# Altium PCB PCB_Diplomarbeit_V2_2025-03-31.pcbdoc
Units mil, origin at the board's own origin, x right, y up, seen from the top; angles counter-clockwise.
Board outline 4740 x 3290 mil, 2 copper layers (Top Layer, Bottom Layer); 76 components, 67 nets, 287 pads, 81 vias.
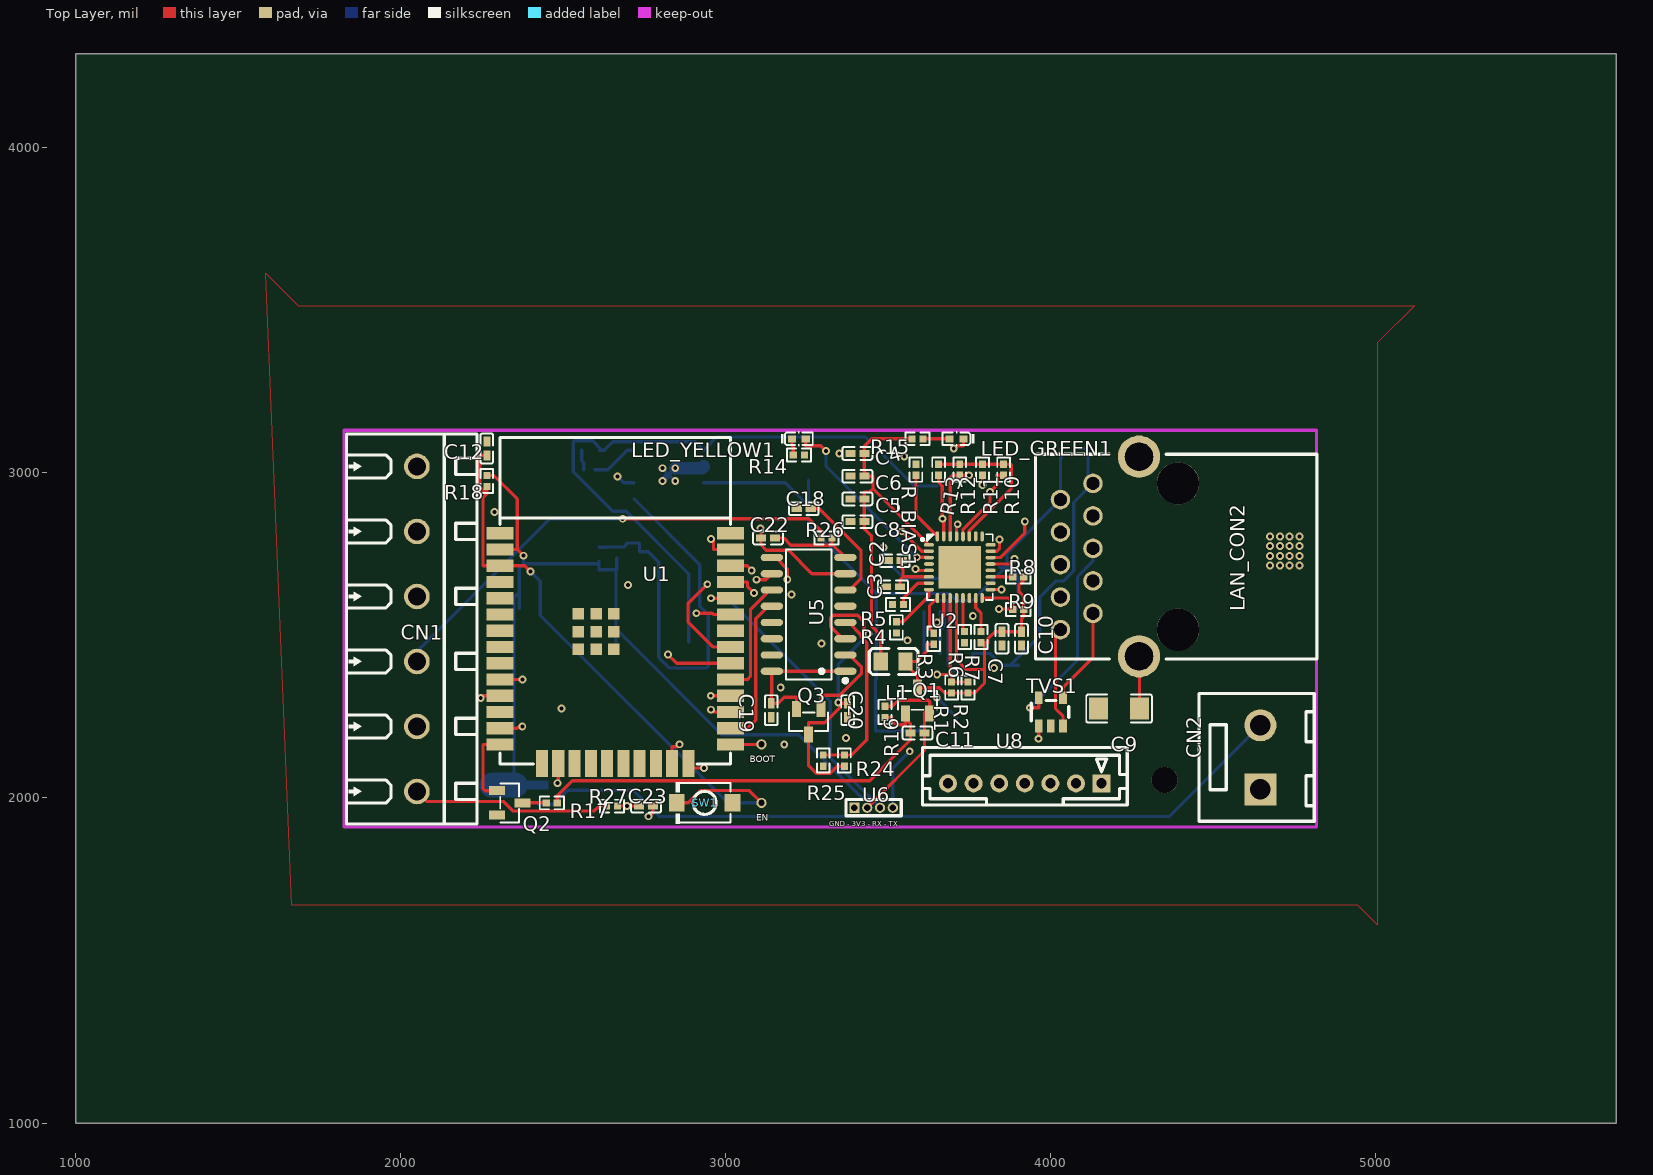
[diagram p0: Top Layer view]
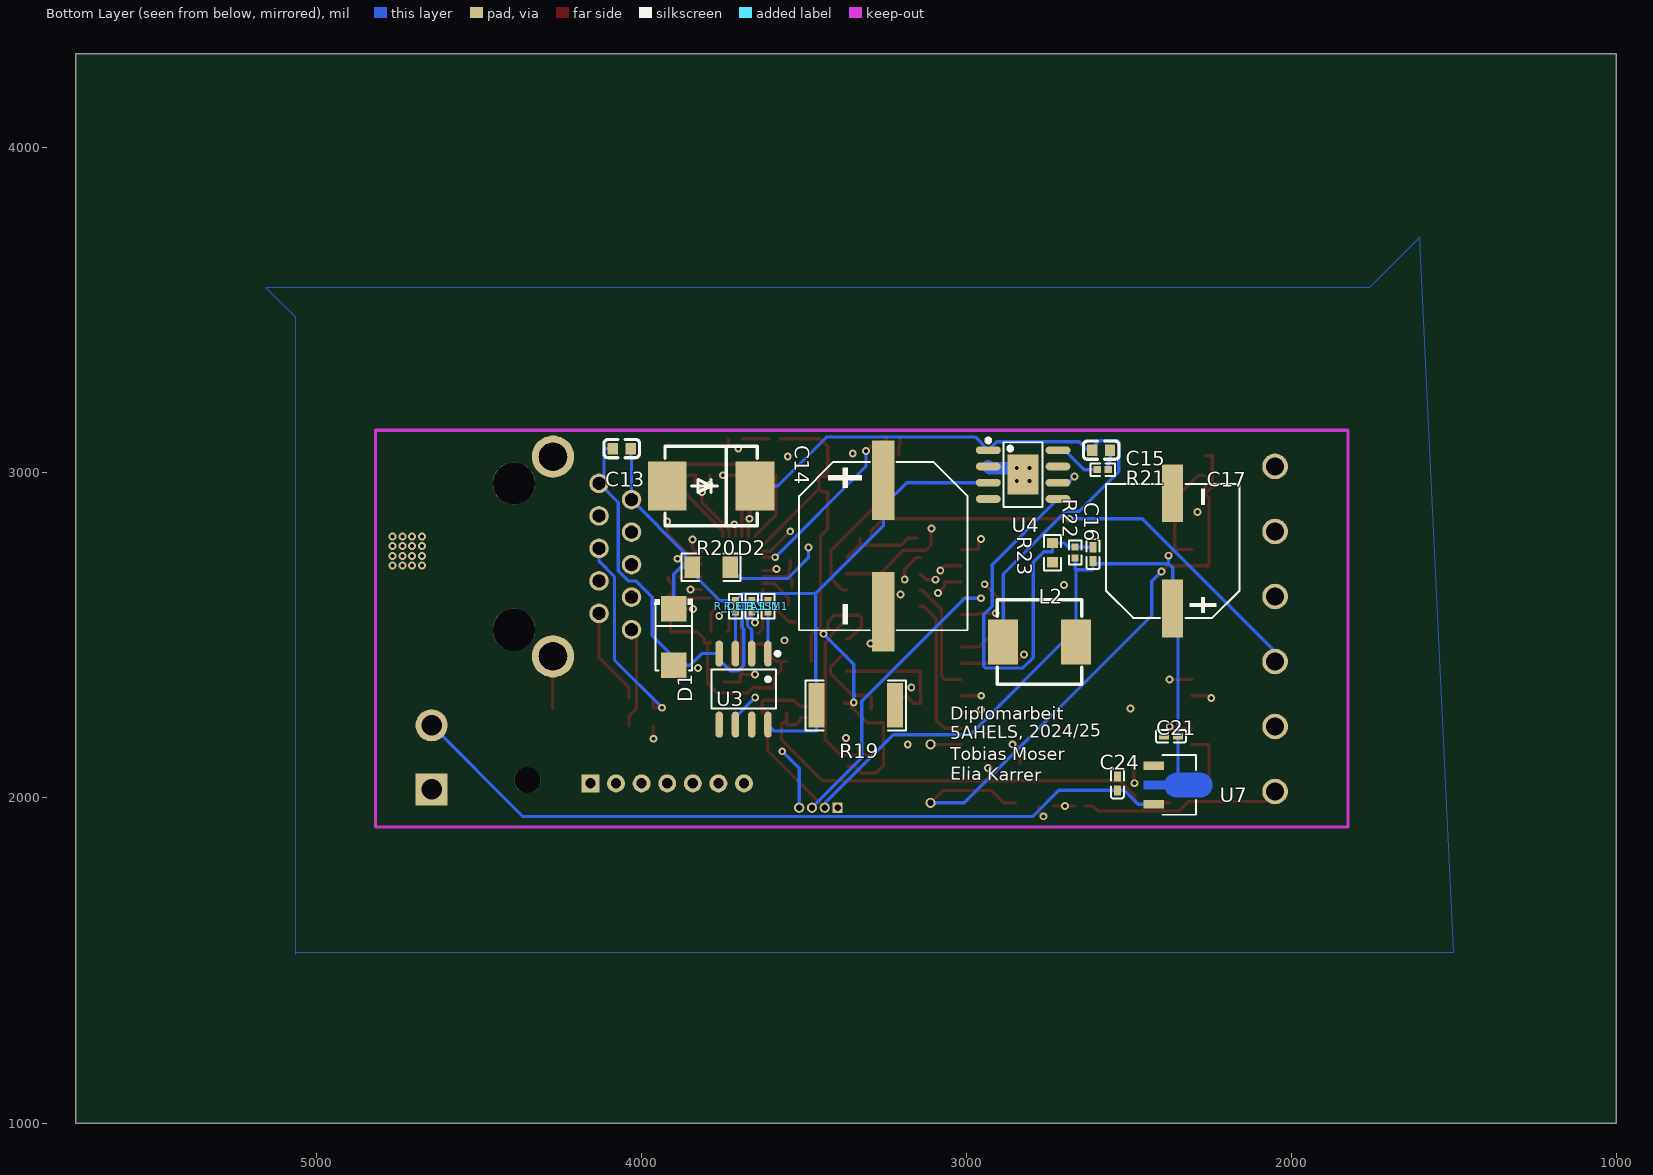
[diagram p1: Bottom Layer view, seen from below]

## Layer stack, top to bottom
Top Layer: signal copper (thickness not stored)
Dielectric: dielectric 12.6, FR-4, Dk 4.8
Bottom Layer: signal copper (thickness not stored)

## Board outline
5740,1000 1000,1000 1000,4290 5740,4290

## Components (designator, comment, footprint, x,y, rotation, side; value= is the part's Value field where it differs from the comment)
C2 "470pF" C0402#1 3520,2730 r0 top
C3 "1uF" C0402#1 3515,2650 r0 top
C4 "100nF" C0402#1 3405,3060 r0 top
C5 "100nF" C0402#1 3405,2920 r0 top
C6 "22uF" C0402#1 3405,2990 r0 top
C7 "100nF" C0402#1 3850,2490 r90 top
C8 "100nF" C0402#1 3405,2850 r0 top
C9 "1nF" C1206 4210,2275 r0 top
C10 "22uF" C0402#1 3910,2490 r90 top
C11 "22uF" C0402#1 3590,2200 r0 top
C12 "1uF" C0402#1 2265,3075 r270 top
C13 "100nF" C0603 4060,3075 r180 bottom
C14 "15uF" CAP-SMD_BD12.5-L13.0-W13.0-FD 3255,2775 r90 bottom
C15 "100nF" C0603 2585,3070 r180 bottom
C16 "12pF" C0402#2 2610,2750 r90 bottom
C17 "470uF" CAP-SMD_BD10.0-L10.3-W10.3-LS11.3-FD 2365,2760 r270 bottom
C18 "100nF" C0402#1 3240,2890 r180 top
C19 "10uF" C0402#1 3140,2270 r90 top
C20 "10uF" C0402#1 3375,2270 r270 top
C21 "100nF" C0402#2 2370,2190 r0 bottom
C22 "100nF" C0402#1 3130,2800 r0 top
C23 "100nF" C0402#1 2755,1975 r0 top
C24 "100nF" C0402#2 2535,2045 r90 bottom
CN1 "MX128-5.08-GN01-06P-CU-Y-A" CONN-TH_6P-MX128-5.08-GN01-06P-CU-Y-A 2050,2520 r270 top
CN2 "978-T-DS/02" CONN-TH_2P-P5.00_978-T-DS-02 4645,2125 r90 top
D1 "SMAJ58A" SMA_L4.3-W2.6-LS5.2-RD 3900,2495 r90 bottom
D2 "SS510" SMC_L7.1-W6.2-LS8.1-R-RD 3785,2960 r180 bottom
L1 "600Ω" L0805 3515,2420 r180 top
L2 "33uH" IND-SMD_L7.2-W6.6_GPSR0730 2775,2480 r0 bottom
LAN_CON2 "RJP-003TC1(LPJ4112CNL)" RJP-003TC1(LPJ4112CNL) 4360,2745 r90 top
LED_GREEN1 "SML-P11MTT86RH" LED0402-RD_GREEN 3710,3105 r180 top
LED_YELLOW1 "TJ-S1005CL4T5ALC9Y-A5" LED0402-RD_YELLOW 3225,3105 r0 top
Q1 "WPM2015-3/TR_C7472861" SOT-23-3_L2.9-W1.3-P1.90-LS2.4-BR 3590,2300 r270 top
Q2 "LMUN2211LT1G" SOT-23-3_L2.9-W1.3-P1.90-LS2.4-BR 2335,1985 r180 top
Q3 "S8550-H" SOT-23-3_L2.9-W1.3-P1.90-LS2.4-BR 3255,2235 r90 top
R1 "2.2kΩ" R0402#1 3695,2340 r270 top
R2 "2.2kΩ" R0402#1 3745,2340 r270 top
R3 "2.2kΩ" R0402#1 3640,2490 r270 top
R4 "2.2kΩ" R0402#1 3525,2525 r270 top
R5 "2.2kΩ" R0402#1 3530,2595 r180 top
R6 "2.2kΩ" R0402#1 3735,2495 r270 top
R7 "2.2kΩ" R0402#1 3785,2495 r270 top
R8 "10kΩ" R0402#1 3900,2680 r0 top
R9 "2.2kΩ" R0402#1 3900,2580 r0 top
R10 "49.9kΩ" R0402#1 3855,3010 r90 top
R11 "49.9kΩ" R0402#1 3790,3010 r90 top
R12 "49.9kΩ" R0402#1 3720,3010 r90 top
R13 "49.9kΩ" R0402#1 3655,3010 r90 top
R14 "2.2kΩ" R0402#1 3225,3055 r0 top
R15 "2.2kΩ" R0402#1 3590,3105 r180 top
R16 "10kΩ" R0402#1 3490,2265 r90 top
R17 "1kΩ" R0402#1 2465,1985 r0 top
R18 "10kΩ" R0402#1 2265,2975 r270 top
R19 "4.7kΩ" R2512 3340,2285 r180 bottom
R20 "0.02Ω" R1206 3785,2710 r180 bottom
R21 "4.7Ω" R0402#2 2580,3010 r0 bottom
R22 "300kΩ" R0402#2 2665,2755 r90 bottom
R23 "96kΩ" R0603 2735,2755 r270 bottom
R24 "20kΩ" R0402#1 3365,2115 r270 top
R25 "8.2kΩ" R0402#1 3300,2115 r90 top
R26 "1.2kΩ" R0402#1 3310,2800 r0 top
R27 "1.2kΩ" R0402#1 2650,1975 r0 top
R_BIAS1 "12.1kΩ" R0402#1 3585,3010 r90 top
R_CLASS1 "357Ω" R0402#2 3660,2590 r90 bottom
R_DET1 "24.9kΩ" R0402#2 3710,2590 r90 bottom
R_ILIM1 "178kΩ" R0402#2 3610,2590 r90 bottom
SW1 "TS-1088-AR02016" SW-SMD_L3.9-W3.0-P4.45 2935,1985 r180 top
TVS1 "ESDS314DBVR" SOT-23-5_L2.9-W1.6-P0.95-LS2.8-BL 4000,2265 r0 top
U1 "ESP32-WROOM-32E(16MB)" WIFI-SMD_ESP32-WROOM-32E 2660,2460 r270 top
U2 "LAN8710A-EZC" QFN-32_L5.0-W5.0-P0.50-BL-EP3.3 3720,2710 r270 top
U3 "TPS2375D" SOIC-8_L4.9-W3.9-P1.27-LS6.0-BL 3685,2335 r180 bottom
U4 "TX4138" SOIC-8_L4.9-W3.9-P1.27-LS6.0-BL-EP 2825,2995 r90 bottom
U5 "HX711" SOP-16_L10.0-W3.9-P1.27-LS6.0-BL 3255,2565 r90 top
U6 "HX PZ1.0-1X4P ZZ" HDR-TH_4P-P1.00-V-M 3455,1970 r0 top
U7 "AMS1117-3.3V-JSM" SOT-89-3_L4.5-W2.5-P1.50-LS4.2-TL 2370,2040 r0 bottom
U8 "B7B-PH-K-S-(LF)(SN)" CONN-TH_B7B-PH-K-S-LF-SN 3920,2045 r0 top

## Footprints (in the part's own frame and the unit in brackets; to place one, negate y for a bottom-side part, rotate by r counter-clockwise, add the part's x,y. Pads: shape width x height; smd on the part's side, far side on the other; paste and mask are expansions set on the pad)
C0402#1 [mm]
  rect 0.79x0.54 smd paste-100 mask+0.051: 1(-0.545,0) 2(0.545,0)
  silkscreen extent -1.17,-0.5 1.17,0.5
C0402#2 [mm]
  rect 0.79x0.54 smd paste-100 mask+0.051: 1(0.545,0) 2(-0.545,0)
  silkscreen extent -1.17,-0.5 1.17,0.5
C0603 [mm]
  rect 0.8x0.9 smd paste+0 mask+0.051: 1(0.7,0) 2(-0.7,0)
  silkscreen extent -1.39,-0.71 1.39,0.71
C1206 [mm]
  rect 1.485x1.728 smd paste-100 mask+0.051: 1(-1.593,0) 2(1.593,0)
  silkscreen extent -2.56,-1.09 2.56,1.09
CAP-SMD_BD10.0-L10.3-W10.3-LS11.3-FD [mm]
  rect 4.5x1.65 smd paste+0 mask+0.051: 1(4.5,0) 2(-4.5,0)
  silkscreen extent -5.23,-5.23 5.23,5.23
CAP-SMD_BD12.5-L13.0-W13.0-FD [mm]
  rect 6.2x1.75 smd paste+0 mask+0.051: 1(5.145,0) 2(-5.145,0)
  silkscreen extent -6.58,-6.58 6.58,6.58
CONN-TH_2P-P5.00_978-T-DS-02 [mm]
  rect 2.5x2.5 hole 1.6 paste+0 mask+0.051: 1(-2.5,0)
  round 2.5 hole 1.6 paste+0 mask+0.051: 2(2.5,0)
  silkscreen extent -5,-4.2 5,4.8
CONN-TH_6P-MX128-5.08-GN01-06P-CU-Y-A [mm]
  round 2 hole 1.4 paste+0 mask+0.05: 1(-12.7,0) 2(-7.62,0) 3(-2.54,0) 4(2.54,0) 5(7.62,0) 6(12.7,0)
  silkscreen extent -15.24,-5.5 15.24,4.7
CONN-TH_B7B-PH-K-S-LF-SN [mm]
  rect 1.4x1.4 hole 0.8 paste+0 mask+0.051: 1(6,0)
  round 1.4 hole 0.8 paste+0 mask+0.051: 2(4,0) 3(2,0) 4(0,0) 5(-2,0) 6(-4,0) 7(-6,0)
  silkscreen extent -8,-1.7 8,2.8
HDR-TH_4P-P1.00-V-M [mm]
  rect 0.8x0.8 hole 0.5 paste+0 mask+0.05: 1(-1.5,0)
  round 0.8 hole 0.5 paste+0 mask+0.05: 2(-0.5,0) 3(0.5,0) 4(1.5,0)
  silkscreen extent -2.16,-0.64 2.16,0.64
IND-SMD_L7.2-W6.6_GPSR0730 [mm]
  rect 2.35x3.5 smd paste+0 mask+0.051: 1(2.85,0) 2(-2.85,0)
  silkscreen extent -3.3,-3.3 3.3,3.3
L0805 [mil]
  rect 44.59x54.21 smd paste-3937.01 mask+2: 1(-38.05,0) 2(38.04,0)
  silkscreen extent -77,-40 73,40
LED0402-RD_GREEN [mm]
  rect 0.636x0.54 smd paste-100 mask+0.051: 1(-0.538,0) 2(0.538,0)
  silkscreen extent -1.39,-0.54 1.09,0.54
LED0402-RD_YELLOW [mm]
  rect 0.636x0.54 smd paste-100 mask+0.051: 1(-0.538,0) 2(0.538,0)
  silkscreen extent -1.39,-0.54 1.09,0.54
QFN-32_L5.0-W5.0-P0.50-BL-EP3.3 [mm]
  oval 0.28x0.78 smd paste-100 mask+0.051: 1(-1.75,-2.408) 2(-1.25,-2.408) 3(-0.75,-2.408) 4(-0.25,-2.408) 5(0.25,-2.408) 6(0.75,-2.408) 7(1.25,-2.408) 8(1.75,-2.408) 17(1.75,2.407) 18(1.25,2.407) 19(0.75,2.407) 20(0.25,2.407) 21(-0.25,2.407) 22(-0.75,2.407) 23(-1.25,2.407) 24(-1.75,2.407)
  oval 0.78x0.28 smd paste-100 mask+0.051: 9(2.407,-1.75) 10(2.407,-1.25) 11(2.407,-0.75) 12(2.407,-0.25) 13(2.407,0.25) 14(2.407,0.75) 15(2.407,1.25) 16(2.407,1.75) 25(-2.408,1.75) 26(-2.408,1.25) 27(-2.408,0.75) 28(-2.408,0.25) 29(-2.408,-0.25) 30(-2.408,-0.75) 31(-2.408,-1.25) 32(-2.408,-1.75)
  rect 3.3x3.3 smd paste-100 mask+0.051: 33(0,0)
  silkscreen extent -2.58,-3.02 2.58,2.58
R0402#1 [mm]
  rect 0.566x0.54 smd paste-100 mask+0.051: 1(-0.433,0) 2(0.433,0)
  silkscreen extent -0.94,-0.5 0.94,0.5
R0402#2 [mm]
  rect 0.566x0.54 smd paste-100 mask+0.051: 1(0.433,0) 2(-0.433,0)
  silkscreen extent -0.94,-0.5 0.94,0.5
R0603 [mil]
  rect 31.75x34.02 smd paste-3937.01 mask+2: 1(29.66,0) 2(-29.66,0)
  silkscreen extent -55,-26 55,26
R1206 [mil]
  rect 47.54x66.97 smd paste-3937.01 mask+2: 1(58.22,0) 2(-58.22,0)
  silkscreen extent -91,-42 91,42
R2512 [mil]
  rect 50.49x136.06 smd paste-3937.01 mask+2: 1(120.72,0) 2(-120.72,0)
  silkscreen extent -155,-77 155,77
RJP-003TC1(LPJ4112CNL) [mil]
  round 129.92 hole 86.62 paste+0 mask+2: 0(-309.17,88.5) 0(305,88.5)
  round 60 hole 39.36 paste+0 mask+2: 1(-227.09,330.24) 2(-177.09,230.24) 3(-127.09,330.24) 4(-77.09,230.24) 5(-27.09,330.24) 6(22.91,230.24) 7(72.91,330.24) 8(122.91,230.24) 9(172.91,330.24) 10(222.91,230.24)
  round 129.92 hole 129.92 unplated paste+0: ""(-227.09,-31.57) ""(222.91,-31.57)
  silkscreen extent -317,-459 313,407
SMA_L4.3-W2.6-LS5.2-RD [mm]
  rect 2x2 smd paste+0 mask+0.051: 1(2.2,0) 2(-2.2,0)
  silkscreen extent -2.6,-1.5 2.98,1.5
SMC_L7.1-W6.2-LS8.1-R-RD [mm]
  rect 3.03x3.82 smd paste+0 mask+0.051: 1(-3.435,0) 2(3.435,0)
  silkscreen extent -3.6,-3.11 3.6,3.11
SOIC-8_L4.9-W3.9-P1.27-LS6.0-BL [mm]
  oval 0.588x2.045 smd paste+0 mask+0.051: 1(1.905,2.773) 2(0.635,2.773) 3(-0.635,2.773) 4(-1.905,2.773) 5(-1.905,-2.773) 6(-0.635,-2.773) 7(0.635,-2.773) 8(1.905,-2.773)
  silkscreen extent -2.53,-1.52 2.8,2.92
SOIC-8_L4.9-W3.9-P1.27-LS6.0-BL-EP [mm]
  oval 0.602x1.941 smd paste+0 mask+0.051: 1(1.905,2.72) 2(0.635,2.72) 3(-0.635,2.72) 4(-1.905,2.72) 5(-1.905,-2.72) 6(-0.635,-2.72) 7(0.635,-2.72) 8(1.905,-2.72)
  rect 3.098x2.41 smd paste+0 mask+0.051: 9(0,0)
  silkscreen extent -2.53,-1.52 2.81,2.87
SOP-16_L10.0-W3.9-P1.27-LS6.0-BL [mm]
  oval 0.56x1.745 smd paste+0 mask+0.051: 1(-4.445,-2.873) 2(-3.175,-2.873) 3(-1.905,-2.873) 4(-0.635,-2.873) 5(0.635,-2.873) 6(1.905,-2.873) 7(3.175,-2.873) 8(4.445,-2.873) 9(4.445,2.873) 10(3.175,2.873) 11(1.905,2.873) 12(0.635,2.873) 13(-0.635,2.873) 14(-1.905,2.873) 15(-3.175,2.873) 16(-4.445,2.873)
  silkscreen extent -5.33,-3.02 5.08,1.77
SOT-23-3_L2.9-W1.3-P1.90-LS2.4-BR [mm]
  rect 1.25x0.7 smd paste+0 mask+0.051: 1(1,-0.95) 2(1,0.95) 3(-1,0)
  silkscreen extent -0.73,-1.53 0.73,1.53
SOT-23-5_L2.9-W1.6-P0.95-LS2.8-BL [mm]
  rect 0.6x1 smd paste+0 mask+0.05: 1(-0.95,-1.1) 2(0,-1.1) 3(0.95,-1.1) 4(0.95,1.1) 5(-0.95,1.1)
  silkscreen extent -1.52,-0.7 1.4,0.89
SOT-89-3_L4.5-W2.5-P1.50-LS4.2-TL [mm]
  rect 1.575x0.672 smd paste+0 mask+0.051: 1(1.356,-1.5) 3(1.356,1.5)
  Top Layer region: -2.283,0.959 -0.429,0.959 -0.384,0.958 -0.34,0.954 -0.296,0.949 -0.252,0.942 -0.208,0.933 -0.165,0.921 -0.123,0.908 -0.081,0.893 -0.04,0.875 0,0.856 0.04,0.835 0.078,0.812 0.115,0.787 0.151,0.761 0.185,0.733 0.219,0.704 0.251,0.672 0.281,0.64 0.31,0.606 0.337,0.571 0.362,0.534 0.386,0.496 0.408,0.458 0.428,0.418 0.447,0.339 2.144,0.339 2.144,-0.321 0.447,-0.321 0.428,-0.401 0.408,-0.44 0.386,-0.479 0.362,-0.517 0.337,-0.553 0.31,-0.589 0.281,-0.623 0.251,-0.655 0.219,-0.686 0.185,-0.716 0.151,-0.744 0.115,-0.77 0.078,-0.795 0.04,-0.818 0,-0.839 -0.04,-0.858 -0.081,-0.875 -0.123,-0.891 -0.165,-0.904 -0.208,-0.915 -0.252,-0.925 -0.296,-0.932 -0.34,-0.937 -0.384,-0.94 -0.429,-0.941 -2.283,-0.941 -2.328,-0.94 -2.372,-0.937 -2.416,-0.932 -2.46,-0.925 -2.504,-0.915 -2.547,-0.904 -2.589,-0.891 -2.631,-0.875 -2.672,-0.858 -2.712,-0.839 -2.752,-0.818 -2.79,-0.795 -2.827,-0.77 -2.863,-0.744 -2.898,-0.716 -2.931,-0.686 -2.963,-0.655 -2.993,-0.623 -3.022,-0.589 -3.049,-0.553 -3.075,-0.517 -3.098,-0.479 -3.12,-0.44 -3.14,-0.401 -3.159,-0.36 -3.175,-0.319 -3.189,-0.277 -3.202,-0.234 -3.212,-0.19 -3.22,-0.147 -3.227,-0.103 -3.231,-0.058 -3.233,-0.014 -3.233,0.031 -3.231,0.075 -3.227,0.12 -3.22,0.164 -3.212,0.208 -3.202,0.251 -3.189,0.294 -3.175,0.336 -3.159,0.377 -3.14,0.418 -3.12,0.458 -3.098,0.496 -3.075,0.534 -3.049,0.571 -3.022,0.606 -2.993,0.64 -2.963,0.672 -2.931,0.704 -2.898,0.733 -2.863,0.761 -2.827,0.787 -2.79,0.812 -2.752,0.835 -2.712,0.856 -2.672,0.875 -2.631,0.893 -2.589,0.908 -2.547,0.921 -2.504,0.933 -2.46,0.942 -2.416,0.949 -2.372,0.954 -2.328,0.958
  silkscreen extent -1.96,-2.33 0.69,2.33
SW-SMD_L3.9-W3.0-P4.45 [mm]
  rect 1.23x1.36 smd paste+0 mask+0.051: 1(-2.185,0) 2(2.185,0)
  silkscreen extent -2.03,-1.62 2.25,1.62
WIFI-SMD_ESP32-WROOM-32E [mm]
  rect 0.95x2.1 smd paste+0 mask+0.051: 1(-9.002,-9) 2(-7.732,-9) 3(-6.462,-9) 4(-5.192,-9) 5(-3.922,-9) 6(-2.652,-9) 7(-1.382,-9) 8(-0.112,-9) 9(1.158,-9) 10(2.428,-9) 11(3.698,-9) 12(4.968,-9) 13(6.238,-9) 14(7.508,-9) 25(7.507,9) 26(6.237,9) 27(4.967,9) 28(3.697,9) 29(2.427,9) 30(1.157,9) 31(-0.113,9) 32(-1.383,9) 33(-2.653,9) 34(-3.923,9) 35(-5.193,9) 36(-6.463,9) 37(-7.733,9) 38(-9.003,9)
  rect 2.1x0.95 smd paste+0 mask+0.051: 15(9.002,-5.715) 16(9.002,-4.445) 17(9.002,-3.175) 18(9.002,-1.905) 19(9.002,-0.635) 20(9.002,0.635) 21(9.002,1.905) 22(9.002,3.175) 23(9.002,4.445) 24(9.002,5.715)
  rect 0.9x0.9 smd paste+0 mask+0.051: 39(-2.721,-0.1) 39(-2.721,-2.9) 39(-2.721,-1.5) 39(-1.322,-0.1) 39(-1.322,-2.9) 39(-1.321,-1.5) 39(0.079,-0.1) 39(0.079,-1.5) 39(0.079,-2.9)
  silkscreen extent -16.48,-9 9.02,9.02

## Free pads (board coordinates)
  round 31.5 hole 19.69 paste+0 mask+1.97: 2(3109.99,1985) 2(3109.99,2165)
  round 80 hole 80 unplated paste+0: ""(4350,2055)

## Via types
v1: diameter 24.02, hole 12.01, Top Layer to Bottom Layer, tented both sides, 44 vias
v2: diameter 24.41, hole 12.2, Top Layer to Bottom Layer, tented both sides, 33 vias
v3: diameter 24, hole 12, Top Layer to Bottom Layer, tented both sides, 4 vias

## Nets (pads, with @x,y where several pads share a name; then routed paths per layer and width w, separated by ;. In a path a pad name is that pad's centre, name@x,y a point inside that pad or via, vN(x,y) a via of type N, cw(c..) or ccw(c..) an arc to the next point about the centre after c; other vN are vias at no path point)
+3V3: C11.2 C16.2 C17.1 C21.2 L2.2 Q1.2 R16.2 R18.1 R22.2 U1.2 U6.2 U8.2 | length 3989.2
  Top Layer w10: R18.1 2286.62,2992.04 2358.47,2920.19 2358.47,2764.9 2358,2764.43 U1.2 ; 2358.48,2764.9 v1(2377.86,2745.52) ; U6.2 3611.46,2146.14 C11.2 3611.46,2262.49 Q1.2@3627.4,2278.43 ; R16.2 3511.62,2282.04 3530.04,2300.46 3623.17,2300.46 3627.4,2296.23 Q1.2@3627.4,2278.43 ; Q1.2 Q1.2@3627.4,2278.43
  Mid-Layer 1 w10: U6.2 3465.33,1939.99 3972.47,1939.99 U8.2
  Bottom Layer w10: 2316.61,2039.66 2348.54,2071.59 C21.2 2348.54,2616.17 C17.1@2365,2632.63 ; C17.1 C17.1@2365,2632.63 ; v1(2377.86,2745.52) 2377.86,2720.84 ; C16.2 C16.2@2610,2715.27 ; L2.2 L2.2@2662.8,2519.95 ; R22.2 2665,2704.2 2662.8,2702 ; U6.2 3435.32,1983.25 3223.99,2194.58 2988.17,2194.58 L2.2@2662.8,2519.95 ; C17.1@2365,2632.63 2365,2682.41 2365,2707.98 2377.86,2720.84 ; 2377.86,2720.84 2604.43,2720.84 C16.2@2610,2715.27 ; C16.2@2610,2715.27 2610,2702 2662.8,2702 ; L2.2@2662.8,2519.95 2662.8,2559.89 2662.8,2702
+12V: C24.2 CN2.2 U7.3 | length 2388.7
  Bottom Layer w10: U7.3 2470.79,1980.95 2513.38,2023.54 2528.16,2023.54 C24.2 2715.26,2023.54 2795.74,1943.06 4364.64,1943.06 CN2.2
CN1_1: C20.1 CN1.1 Q3.3 R24.2 U5.3 | length 2519.4
  Top Layer w10: v1(3346.3,2293.34) 3351.5,2293.34 v1@3353.38,2291.46 ; R24.2 3343.38,2097.96 3321.19,2075.77 3278.31,2075.77 3255,2099.08 Q3.3 3255,2231.23 3303.96,2231.23 3353.38,2280.65 v1@3353.38,2291.46 ; U5.3 3359.77,2490 3322.68,2527.09 3322.68,2554.07 3330.69,2562.08 3405.49,2562.08 3425.11,2542.46 3425.11,2519.66 v1(3439.67,2505.1) ; C20.1 v1@3353.38,2291.46
  Mid-Layer 2 w10: CN1.1 2347.54,2722.46 2387.42,2722.46 2388.45,2723.49 3221.28,2723.49 v1(3439.67,2505.1)
  Bottom Layer w10: v1(3346.3,2293.34) 3346.3,2411.73 v1(3439.67,2505.1)
CN1_3: C22.1 CN1.3 U5.7 | length 1491.2
  Top Layer w10: v1@3107.2,2829.05 3108.54,2827.71 C22.1 3108.54,2778.38 3124.84,2762.08 3193.21,2762.08 3265.29,2690 U5.7
  Mid-Layer 1 w10: CN1.3 2259.05,2829.05 v1@3107.2,2829.05
  other v1: 3107.2,2829.05
CN1_4: CN1.4 R26.1 | length 1479.5
  Top Layer w10: v1(2683.01,2858.8) 3255.78,2858.8 3292.96,2821.62 R26.1
  Bottom Layer w10: CN1.4 2050,2450.27 2458.53,2858.8 v1(2683.01,2858.8)
CN1_5: C23.2 CN1.5 U5.9 | length 1866.1
  Top Layer w10: v1(2762.49,1943.69) 2772.18,1953.38 2776.46,1953.38 C23.2 ; U5.9 3153.27,2740 3189.47,2703.8 v1(3189.47,2672.28)
  Mid-Layer 2 w10: CN1.5 2326.31,1943.69 v1(2762.49,1943.69) 2762.49,2245.3 v1(3189.47,2672.28)
CN1_6: CN1.6 R27.1 | length 613.9
  Top Layer w10: CN1.6 2080.61,1989.39 2315.61,1989.39 2344.84,1960.16 2596,1960.16 2610.84,1975 R27.1
ESP_RX: U1.34 U6.3 | length 948.7
  Top Layer w10: v1(2954.91,2614.43) 2962,2614.43 U1.34
  Bottom Layer w10: v1(2954.91,2614.43) 3005.29,2614.43 3321.5,2298.22 3321.5,2123.19 U6.3
ESP_TX: U1.35 U6.4 | length 1137.3
  Top Layer w10: U1.35 3066.66,2664.43 3066.66,2651.13 v1(3087.11,2630.68)
  Mid-Layer 2 w10: v1(3087.11,2630.68) 3153.16,2696.73 3204.44,2696.73 3566.02,2335.15 v1(3566.02,2143.58)
  Bottom Layer w10: U6.4 3514.06,2091.62 v1(3566.02,2143.58)
GND: C2.1 C3.1 C4.1 C5.1 C6.1 C7.1 C8.1 C9.1 C10.1 C12.1 C14.2 C17.2 C18.2 C19.1 C20.2 C21.1 C24.1 CN1.2 CN2.1 D2.1 LAN_CON2.7 LAN_CON2.8 Q2.2 R4.2 R5.2 R6.2 R14.2 R19.1 R23.1 R25.1 R_BIAS1.2 SW1.1 TVS1.2 U1.1 U1.15 U1.38 U1.39 U2.24 U2.25 U2.33 U3.5 U4.4 U5.5 U5.14 U6.1 U7.1 U8.1 | length 5
  Top Layer w10: v2@3755,2560 v2(3760,2560)
  other v2: 3180,2165 3370,2185 2495,2275 3169.21,2340.22 3825,2400 3295,2475 3559.21,2485.22 2699.21,2655.22 4675,2715 4705,2715 4735,2715 4765,2715 4675,2745 4705,2745 4735,2745 4765,2745 4675,2775 4705,2775 4735,2775 4765,2775 4675,2805 4705,2805 4735,2805 4765,2805 2289.21,2880.22 3549.21,3050.22 3349.21,3060.22
GPIO0: pad.2@3109.99,2165 U1.25 | length 95.9
  Top Layer w10: U1.25 3109.43,2164.43 pad.2@3110,2165
GPIO2: U1.24 U8.7 | length 823.9
  Top Layer w10: U1.24 2898.31,2092.27 v1(2932.82,2092.27)
  Mid-Layer 1 w10: v1(2932.82,2092.27) 3636.51,2092.27 U8.7
GPIO4: U1.26 U5.12 | length 465.5
  Top Layer w10: U1.26 3066.66,2214.43 3092.02,2239.79 3092.02,2300.35 3092.02,2551.1 3130.92,2590 U5.12
GPIO5: U1.29 U5.11 | length 362.1
  Top Layer w10: U1.29 3066.66,2364.43 3075.96,2373.73 3075.96,2579.28 3136.68,2640 U5.11
GPIO12: Q2.1 U1.14 | length 232.7
  Top Layer w10: Q2.1 2260.03,2022.4 2253.34,2029.09 2253.34,2164.43 U1.14
GPIO14: U1.13 U8.6 | length 1531.6
  Top Layer w10: U1.13 2358,2214.43 2363.51,2219.94 v1(2374.22,2219.94)
  Mid-Layer 1 w10: v1(2374.22,2219.94) 3587.58,2219.94 U8.6
GPIO15: U1.23 U8.5 | length 1111.4
  Top Layer w10: U1.23 2835.01,2157.9 2850.95,2157.9 v1(2858.24,2165.19)
  Mid-Layer 2 w10: v1(2858.24,2165.19) 2908.09,2115.34 3770.92,2115.34 U8.5
GPIO17: U1.28 U2.5 | length 932.2
  Top Layer w10: v1(2953.9,2314.43) 2962,2314.43 U1.28 ; v1(3583.66,2704.48) 3587.98,2700.16 U2.5
  Mid-Layer 1 w10: v1@3201.94,2625.85 3280.57,2704.48 v1(3583.66,2704.48)
  Mid-Layer 2 w10: v1(2953.9,2314.43) 2953.9,2377.81 v1@3201.94,2625.85
  other v1: 3201.94,2625.85
GPIO18: R9.1 U1.30 U2.16 | length 1443.9
  Top Layer w10: v1(2821.96,2441.51) 2849.04,2414.43 U1.30 ; U2.16 3869.36,2615.22 3882.96,2601.62 R9.1@3882.96,2581.48 ; v1(3840.93,2581.48) R9.1@3882.96,2581.48 ; R9.1 R9.1@3882.96,2581.48
  Mid-Layer 1 w10: v1(2821.96,2441.51) 3700.96,2441.51 v1(3840.93,2581.48)
GPIO19: U1.31 U2.23 | length 1317.6
  Top Layer w10: v1(2943.37,2657.42) 2883.58,2597.63 2883.58,2542.85 2962,2464.43 U1.31 ; U2.23 3834.48,2759.21 3842.02,2766.75 v1(3842.02,2795.54)
  Mid-Layer 1 w10: v1(2943.37,2657.42) 3081.49,2795.54 v1(3842.02,2795.54)
GPIO21: U1.33 U2.21 | length 1235.3
  Top Layer w10: v1(2909.52,2568.35) 2958.08,2568.35 2962,2564.43 U1.33 ; U2.21 3872.33,2719.84 v1(3888.49,2736)
  Mid-Layer 1 w10: v1(2909.52,2568.35) 3285.95,2568.35 3720.84,2568.35 v1(3888.49,2736)
GPIO22: U1.36 U2.22 | length 1174.3
  Top Layer w10: U1.36 3065.57,2714.43 v2(3080,2700) ; U2.22 3844.53,2739.53 3920,2815 v2(3920,2850)
  Mid-Layer 3 w10: v2(3080,2700) 3265,2885 3810,2885 3845,2850 v2(3920,2850)
GPIO23: U1.37 U2.17 | length 1079.4
  Top Layer w10: v1(2954.87,2797) 2962,2789.87 2962,2764.43 U1.37 ; U2.17 v1(3848.33,2641.1)
  Mid-Layer 2 w10: v1(2954.87,2797) 3692.43,2797 v1(3848.33,2641.1)
GPIO25: R1.1 R2.1 U1.10 U2.11 | length 1704.8
  Top Layer w10: U1.10 v2(2375,2365) ; v2(3650,2380) 3693.3,2379.2 ; U2.11 3690.47,2382.05 3693.35,2379.17 3695,2379.17 R1.1 R2.1
  Mid-Layer 3 w10: v2(2375,2365) 2390,2380 v2(3650,2380)
GPIO26: U1.11 U2.10 | length 1646.2
  Top Layer w10: v1(2246.29,2307.38) 2253.34,2314.43 U1.11 ; v1(3650,2540.01) 3670.79,2560.8 U2.10
  Mid-Layer 1 w10: v1(2246.29,2307.38) 2478.92,2540.01 v1(3650,2540.01)
I2C_SCL: U1.27 U8.3 | length 1200.6
  Top Layer w10: v1(2954.72,2271.71) 2962,2264.43 U1.27
  Mid-Layer 1 w10: v1(2954.72,2271.71) 2956.15,2270.28 3773.46,2270.28 U8.3
I2C_SDA: U1.16 U8.4 | length 1532.8
  Top Layer w10: v1(2482,2045.57) 2485.01,2048.58 U1.16
  Mid-Layer 1 w10: v1(2482,2045.57) 3596.41,2045.56 3637.14,2004.83 3879.83,2004.83 U8.4
LAN_CON2_0: C9.2 LAN_CON2.0 | length 775.5
  Top Layer w10: LAN_CON2.0@4271.5,2435.83 4272.7,2434.63 C9.2
  Mid-Layer 2 w10: LAN_CON2.0@4271.5,2435.83 LAN_CON2.0@4271.5,3050
LED_GREEN_2: LED_GREEN1.2 R15.1 | length 81.8
  Top Layer w10: R15.1 LED_GREEN1.2
LED_YELLOW_1: LED_YELLOW1.1 R14.1 | length 51.7
  Top Layer w10: LED_YELLOW1.1 3203.81,3083.38 3207.96,3079.23 R14.1
POE+: C13.1 C14.1 D1.1 LAN_CON2.9 R19.2 R20.2 R_DET1.1 U3.8 U4.3 | length 2425.8
  Bottom Layer w10: U4.3 3183.24,2970 C14.1@3255,2898.24 ; C14.1 C14.1@3255,2898.24 ; U3.8@3610,2225.85 3590.13,2205.98 3460.72,2205.98 R19.2 3460.72,2364.02 3462.73,2366.03 3462.73,2629.47 ; R20.2 R20.2@3860.6,2710 ; D1.1 3900,2631.97 3900,2687.98 3877.98,2710 3867.86,2710 ; C13.1 4032.44,3046.29 4029.76,3043.61 LAN_CON2.9 3865.43,2753.58 3865.43,2712.43 3867.86,2710 ; C14.1@3255,2898.24 3255,2837.2 3462.73,2629.47 ; 3462.73,2629.47 3687.57,2629.47 R_DET1.1 3757.64,2607.04 R20.2@3860.6,2710 ; R20.2@3860.6,2710 3867.86,2710
POE-: C13.2 D1.2 LAN_CON2.10 R_CLASS1.1 R_ILIM1.1 U3.4 | length 1364.6
  Bottom Layer w10: R_ILIM1.1 R_CLASS1.1 3681.62,2607.04 3684.94,2603.72 3684.94,2560.39 3689.11,2556.22 3689.11,2523.8 3684.94,2519.63 3684.94,2408.25 3702.87,2390.32 3724.72,2390.32 3760,2425.6 U3.4 3813.88,2444.15 3849.64,2408.39 D1.2@3874.82,2408.39 ; D1.2 D1.2@3874.82,2408.39 ; C13.2 4114.3,3075 4114.3,2983.37 LAN_CON2.10 4070.82,2908.97 4070.82,2699.16 4039.57,2667.91 4016.43,2667.91 3966.05,2617.53 3966.05,2499.62 D1.2@3874.82,2408.39
Q1_1: C11.1 Q1.1 R16.1 R17.2 | length 1364.3
  Top Layer w10: R17.2 2482.04,2006.62 2528.47,2053.05 3442.89,2053.05 3568.22,2178.38 3568.54,2178.38 C11.1 3568.54,2226.89 Q1.1@3552.6,2242.83 ; R16.1 3511.62,2247.96 3511.62,2237.15 3523.74,2225.03 3552.6,2225.03 Q1.1@3552.6,2242.83 ; Q1.1 Q1.1@3552.6,2242.83
R17_1: Q2.3 R17.1 | length 73.6
  Top Layer w10: Q2.3 R17.1
R21_2: C15.1 R21.2 | length 62.3
  Bottom Layer w10: C15.1 2557.44,3037.14 2562.96,3031.62 R21.2
R_CLASS_2: R_CLASS1.2 U3.2 | length 139.6
  Bottom Layer w10: U3.2 3660,2517.39 3673.06,2530.45 3673.06,2549.57 3660,2562.63 R_CLASS1.2
R_DET_2: R_DET1.2 U3.3 | length 128.8
  Bottom Layer w10: U3.3 R_DET1.2
R_ILIM_2: R_ILIM1.2 U3.1 | length 128.8
  Bottom Layer w10: U3.1 R_ILIM1.2
RD+: LAN_CON2.3 R13.1 TVS1.1 U2.31 | length 1134
  Top Layer w10: R13.1 3655,2970.84 3666.48,2959.36 v1(3666.48,2859.07) 3670.79,2854.76 U2.31 ; v1(3962.6,2182.21) TVS1.1
  Mid-Layer 2 w10: v1(3666.48,2859.07) 3666.48,2842.88 3696.3,2813.06 3710.31,2813.06 3967.61,2555.76 ; v1(3962.6,2182.21) 3962.6,2550.75 3967.61,2555.76 ; LAN_CON2.3 3967.61,2555.76
RD-: LAN_CON2.6 R12.1 TVS1.5 U2.30 | length 1356.7
  Top Layer w10: U2.30 3690.47,2985.05 3698.38,2992.96 R12.1 3741.62,2992.96 v1(3748.72,2992.96) ; v1(3935.73,2277.63) 3962.6,2277.63 TVS1.5
  Mid-Layer 2 w10: v1(3748.72,2992.96) 3748.72,2971.8 3952.61,2767.91 LAN_CON2.6
  Bottom Layer w10: v1(3935.73,2277.63) 4082.14,2424.04 4082.14,2680.11 4129.76,2727.73 LAN_CON2.6
TD+: LAN_CON2.1 R11.1 TVS1.3 U2.29 | length 1248.7
  Top Layer w10: U2.29 3710.16,2838.75 v1(3713.59,2842.18) ; v1(3790,2963.13) R11.1 ; LAN_CON2.1 4014.53,2502.68 4014.53,2275.23 4037.4,2252.36 TVS1.3
  Mid-Layer 2 w10: v1(3713.59,2842.18) 3759.2,2887.79 ; v1(3790,2963.13) 3790,2986.89 3757.18,3019.71 3736.9,3019.71 3721.21,3004.02 3721.21,2925.78 3759.2,2887.79 ; LAN_CON2.1 4075.61,2563.76 4075.61,2637.91 4037.56,2675.96 4010.71,2675.96 3798.88,2887.79 3759.2,2887.79
TD-: LAN_CON2.2 R10.1 TVS1.4 U2.28 | length 1212.9
  Top Layer w10: U2.28 3729.84,2825.81 3812.66,2908.63 v1(3812.66,2941) 3833.38,2961.72 3833.38,2992.96 R10.1 ; TVS1.4 4037.4,2338.98 4129.76,2431.34 LAN_CON2.2
  Mid-Layer 2 w10: v1(3812.66,2941) 3880.08,2873.58 4042.3,2873.58 4097.97,2817.91 4139.4,2817.91 4176.37,2780.94 4176.37,2614.52 LAN_CON2.2
U1_3: C12.2 pad.2@3109.99,1985 R18.2 SW1.2 U1.3 | length 1909.5
  Top Layer w10: R18.2 2265,2935.84 ; C12.2 2243.38,3053.54 2243.31,3053.47 2243.31,2957.53 2265,2935.84 ; v1(2398.95,2696.94) 2381.46,2714.43 U1.3 2279.51,2714.43 2253.34,2714.43 2253.27,2714.5 2253.27,2924.11 2265,2935.84 ; SW1.2 2884.18,1985 2922.01,2022.83 3072.17,2022.83 pad.2@3110,1985
  Bottom Layer w10: v1(2398.95,2696.94) 2429.32,2666.57 2429.32,2561.5 3005.82,1985 pad.2@3110,1985
U2_2: LED_GREEN1.1 U2.2 | length 484.8
  Top Layer w10: v1(3541.55,2820.38) 3602.72,2759.21 U2.2 ; v1@3701.44,3075.25 3709.57,3083.38 3731.19,3083.38 LED_GREEN1.1
  Mid-Layer 2 w10: v1(3541.55,2820.38) 3541.55,2915.36 v1@3701.44,3075.25
  other v1: 3701.44,3075.25
U2_3: LED_YELLOW1.2 U2.3 | length 570.9
  Top Layer w10: LED_YELLOW1.2 3246.19,3083.38 3292.6,3083.38 v1(3308.82,3067.16) ; v1@3587.89,2740.65 3624.1,2740.65 U2.3
  Bottom Layer w10: v1(3308.82,3067.16) 3308.82,3019.72 v1@3587.89,2740.65
  other v1: 3587.89,2740.65
U2_7: R5.1 U2.7 | length 118.1
  Top Layer w10: R5.1 3547.04,2616.62 3591.21,2660.79 U2.7
U2_8: R4.1 U2.8 | length 153.2
  Top Layer w10: R4.1 3546.62,2542.04 3625.22,2620.64 U2.8
U2_9: R3.1 U2.9 | length 123.6
  Top Layer w10: R3.1 3626.94,2520.1 3626.94,2591.06 U2.9
U2_13: R6.1 U2.13 | length 105.3
  Top Layer w10: U2.13 3729.84,2517.2 R6.1
U2_15: R7.1 U2.15 | length 109.7
  Top Layer w10: U2.15 3769.21,2585.22 3785,2569.43 R7.1
U2_19: R8.1 U2.19 | length 68.4
  Top Layer w10: U2.19 3860.37,2680.47 3860.84,2680 R8.1
U2_32: R_BIAS1.1 U2.32 | length 215.6
  Top Layer w10: R_BIAS1.1 3585,2870.88 U2.32
U3_6: U3.6 U4.6 | length 1442.4
  Mid-Layer 2 w10: v1(2667.03,2989.29) 2882.38,2773.94 3203.45,2773.94 3649.41,2327.98 v1(3649.41,2309.6)
  Bottom Layer w10: v1(2667.03,2989.29) 2686.32,2970 U4.6 ; v1(3649.41,2309.6) 3710,2249.01 U3.6@3710,2225.85
U4_1: C15.2 D2.2 L2.1 U4.1 | length 2027.9
  Bottom Layer w10: C15.2 C15.2@2619.25,3070 ; L2.1 2886.46,2480.74 2886.46,2689.03 2693.63,2881.86 2651.88,2881.86 2530.63,3003.11 2530.63,3095.87 2533.54,3098.78 2590.47,3098.78 C15.2@2619.25,3070 ; D2.2 3579.13,2960 3428.46,3110.67 2972.78,3110.67 U4.1 2905.98,3096.13 2652.06,3096.13 2625.93,3070 C15.2@2619.25,3070
U4_2: R20.1 U4.2 U4.9 | length 542
  Bottom Layer w10: v3(2805.32,2975.31) U4.9 ; v3(2805.32,3014.68) U4.9 ; v3(2844.69,2975.31) U4.9 ; v3(2844.69,3014.68) U4.9 ; v2(3485,2770) 3485,2740 3550,2675 3691.78,2675 R20.1
  Bottom Layer w19.68: v3(2805.32,2975.31) U4.9
  Bottom Layer w39.37: v3(2844.69,3014.68) 2926.79,3014.68 U4.2
U4_5: C16.1 R22.1 R23.2 U4.5 | length 1300.5
  Bottom Layer w10: C16.1 2631.62,2771.46 2632.2,2772.04 R22.1 2686.62,2772.04 2699.24,2784.66 R23.2 2735,2757.79 2761.87,2757.79 2794.11,2725.55 2794.11,2431.96 2826.15,2399.92 2941.09,2399.92 2946.26,2405.09 2946.26,2564.23 2920.31,2590.18 2920.31,2717.58 U4.5
U4_8: R21.1 U4.8 | length 145.7
  Bottom Layer w10: R21.1 2637.41,3010 2697.41,3070 U4.8
U5_1: C19.2 Q3.2 U5.1 U5.16 | length 446.4
  Top Layer w10: Q3.2 3217.6,2309.97 3180.13,2309.97 3161.62,2291.46 C19.2 3140,2318 3141.91,2319.91 U5.16 U5.1
U5_2: Q3.1 U5.2 | length 275.9
  Top Layer w10: Q3.1 3292.4,2309.97 3298.83,2316.4 3350.47,2316.4 3417.99,2383.92 3417.99,2402.56 3380.55,2440 U5.2
U5_4: R24.1 R25.2 U5.4 | length 547.2
  Top Layer w10: R25.2 R24.1 3386.62,2132.04 3434.11,2179.53 3434.11,2478.05 3416.61,2495.55 3416.61,2501.02 3377.63,2540 U5.4
U5_6: C18.1 U5.6 | length 357.4
  Top Layer w10: C18.1 3288,2890 3416.01,2761.99 3416.01,2674.2 3381.81,2640 U5.6
U5_8: C22.2 R26.2 U5.8 | length 263.7
  Top Layer w10: C22.2 3178,2800 3200.33,2777.67 3326.33,2777.67 3327.04,2778.38 ; R26.2 3327.04,2782.35 3327.04,2778.38 ; U5.8 3329.71,2778.38 3327.04,2778.38
U5_10: C23.1 R27.2 U5.10 | length 982.8
  Top Layer w10: R27.2 v1(2696.54,1975) 2707,1975 C23.1 ; v1(3094.9,2671.69) 3123.6,2671.69 U5.10
  Mid-Layer 2 w10: v1(2696.54,1975) 2696.54,2273.33 v1(3094.9,2671.69)
VDD1A: C4.2 C5.2 C6.2 C8.2 L1.2 R15.2 U2.1 | length 1135.3
  Top Layer w10: C6.2 C6.2@3439.73,2990 ; L1.2 3476.96,2500.42 3448.08,2529.3 3448.08,2806.76 3426.46,2828.38 3426.46,2839.19 C8.2 C5.2 3426.46,2941.62 3443.5,2941.62 3453,2951.12 ; R15.2 3449.84,3105 3426.46,3081.62 C4.2 3426.46,3003.27 C6.2@3439.73,2990 ; U2.1 3453,2951.12 ; C6.2@3439.73,2990 3453,2990 3453,2951.12
VDD2A: R10.2 R11.2 R12.2 R13.2 U2.27 | length 498.1
  Top Layer w10: R13.2 R12.2 R11.2 R10.2 3876.62,3027.04 3878.5,3025.16 3878.5,2951.77 3749.53,2822.8 U2.27
VDDCR: C2.2 C3.2 U2.6 | length 165.2
  Top Layer w10: C3.2 3536.46,2671.62 3545.31,2680.47 ; C2.2 3541.46,2708.38 3545.31,2704.53 3545.31,2680.47 ; U2.6 3545.31,2680.47
VDDIO: C7.2 C10.2 L1.1 Q1.3 R1.2 R2.2 R3.2 R7.2 R8.2 R9.2 U2.12 | length 1213.6
  Top Layer w10: L1.1 L1.1@3569.69,2420 ; R3.2 3618.38,2472.96 3618.38,2452.05 3586.33,2420 L1.1@3569.69,2420 ; U2.12 3710.2,2424.8 3740,2395 3795.8,2395 3795.8,2429.9 ; R7.2 3795.81,2477.96 ; R8.2 3917.04,2669.72 3902.05,2654.73 3902.05,2635.64 3917.04,2620.65 R9.2 3917.04,2558.38 3910,2551.34 C10.2 3871.62,2511.46 C7.2 3828.38,2511.46 3806.62,2489.7 3806.62,2477.96 3795.81,2477.96 ; L1.1@3569.69,2420 3569.69,2395.28 3590,2374.97 Q1.3 3656.97,2339.37 3673.38,2322.96 R1.2 R2.2 3766.62,2322.96 3795.81,2352.15 3795.81,2477.96
pads on no net: LAN_CON2. LAN_CON2.4 LAN_CON2.5 U1.4 U1.5 U1.6 U1.7 U1.8 U1.9 U1.12 U1.17 U1.18 U1.19 U1.20 U1.21 U1.22 U1.32 U2.4 U2.14 U2.18 U2.20 U2.26 U3.7 U4.7 U5.13 U5.15
copper on no net: | length 0

## Polygon pours and split planes (outlines as drawn)
U4_2 on Mid-Layer 4 (solid): 2290,3255 2290,2755 3685,2755 3730,2800 3730,3250 3715,3265
GND on Mid-Layer 4 (solid): 1630,3480 1700,3410 5075,3410 5035,3370 5035,1745 5020,1730 1515,1730
GND on Mid-Layer 3 (solid): 1530,3790 1790,3530 5240,3530 5095,3385 5095,1520 5075,1500 1545,1500
U4_2 on Mid-Layer 1 (solid): 2285,3250 2285,2685 2245,2645 3730,2645 3740,2655 3740,3120 3680,3180
GND on Top Layer (solid): 1585,3615 1685,3515 5120,3515 5005,3400 5005,1610 4945,1670 1665,1670
GND on Bottom Layer (solid): 1605,3725 1760,3570 5155,3570 5065,3480 5065,1520 5060,1525 1500,1525

## Silkscreen, mask and mechanical layers (free items; w line width, h text height)
Top Overlay:
  text "BOOT" at 3074.21,2110.38 h19.68
  text "EN" at 3094.21,1930.38 h19.68
  text "GND - 3V3 - RX - TX" at 3319.21,1912.35 h15.75
Bottom Overlay:
  text "Diplomarbeit" at 3049.21,2240.53 h39.37
  text "5AHELS, 2024/25" at 3048.87,2180.54 h39.37 r359
  text "Tobias Moser" at 3049.21,2115.53 h39.37
  text "Elia Karrer" at 3049.55,2055.54 h39.37 r1